# Altium PCB Power_Supply_HV.PcbDoc
Units mm, origin at the board's own origin, x right, y up, seen from the top; angles counter-clockwise.
Board outline 85.1 x 52.1 mm, 2 copper layers (Top Layer, Bottom Layer); 37 components, 19 nets, 76 pads, 120 vias.
Unrouted connection lines stored in the file: 14.
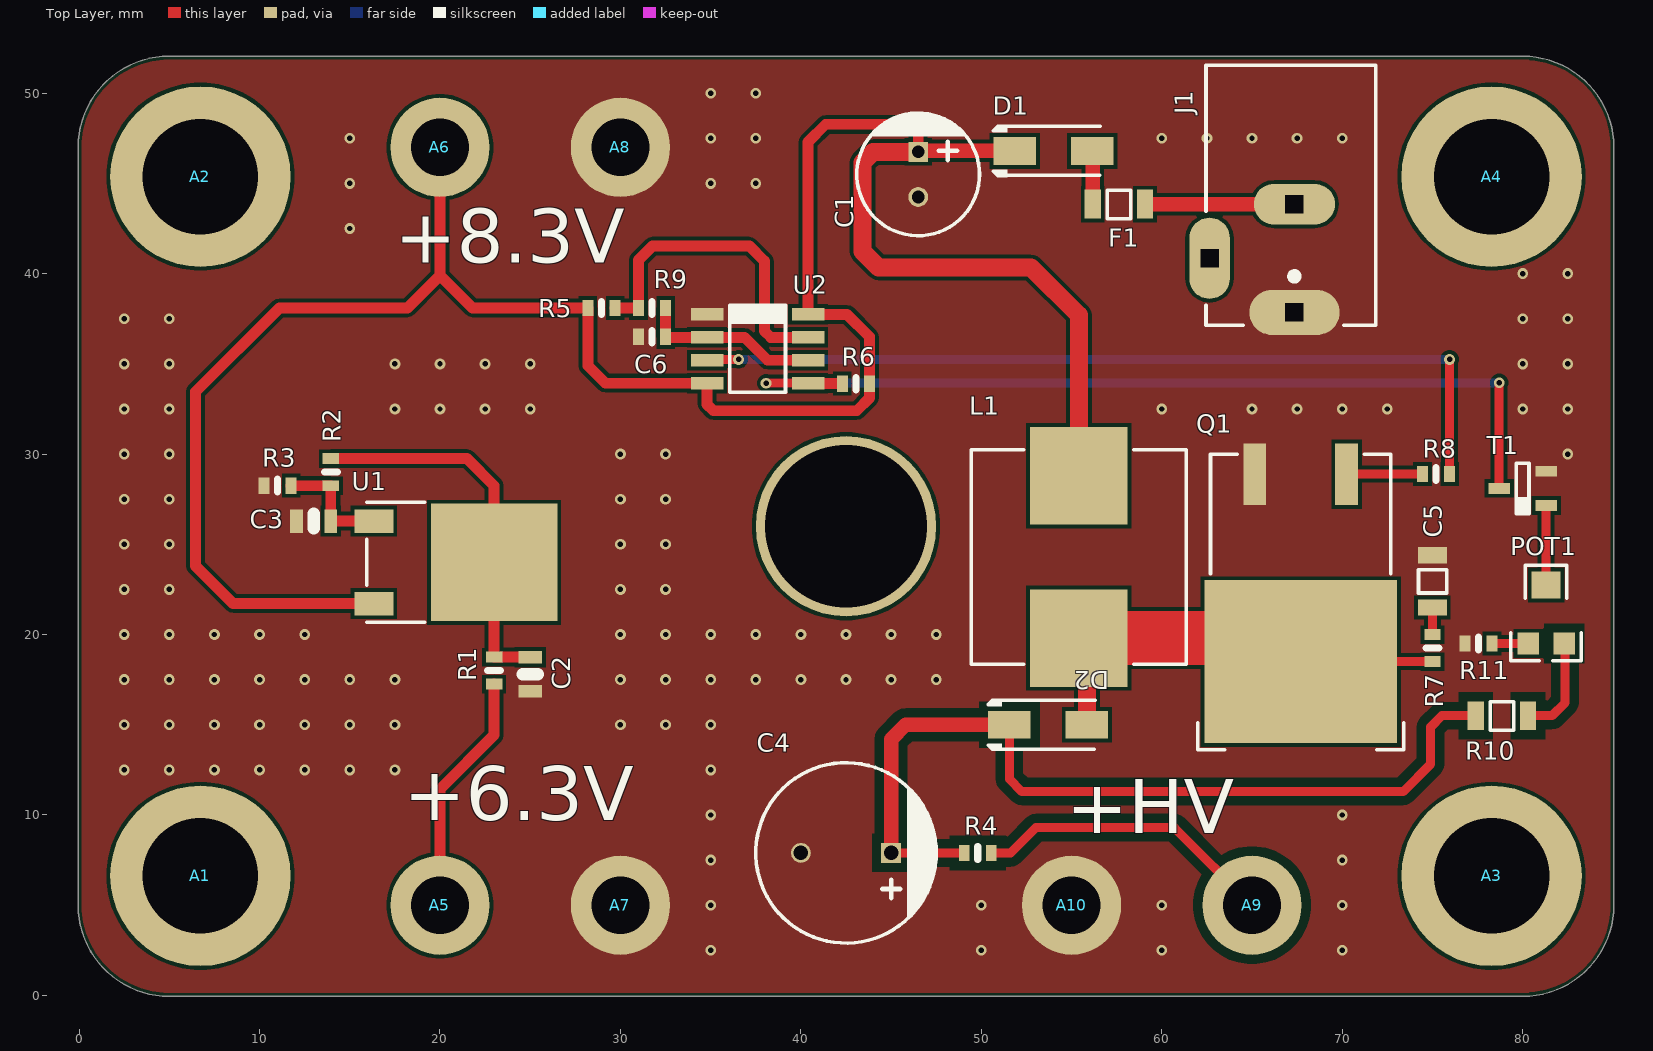
[diagram p0: Top Layer view]
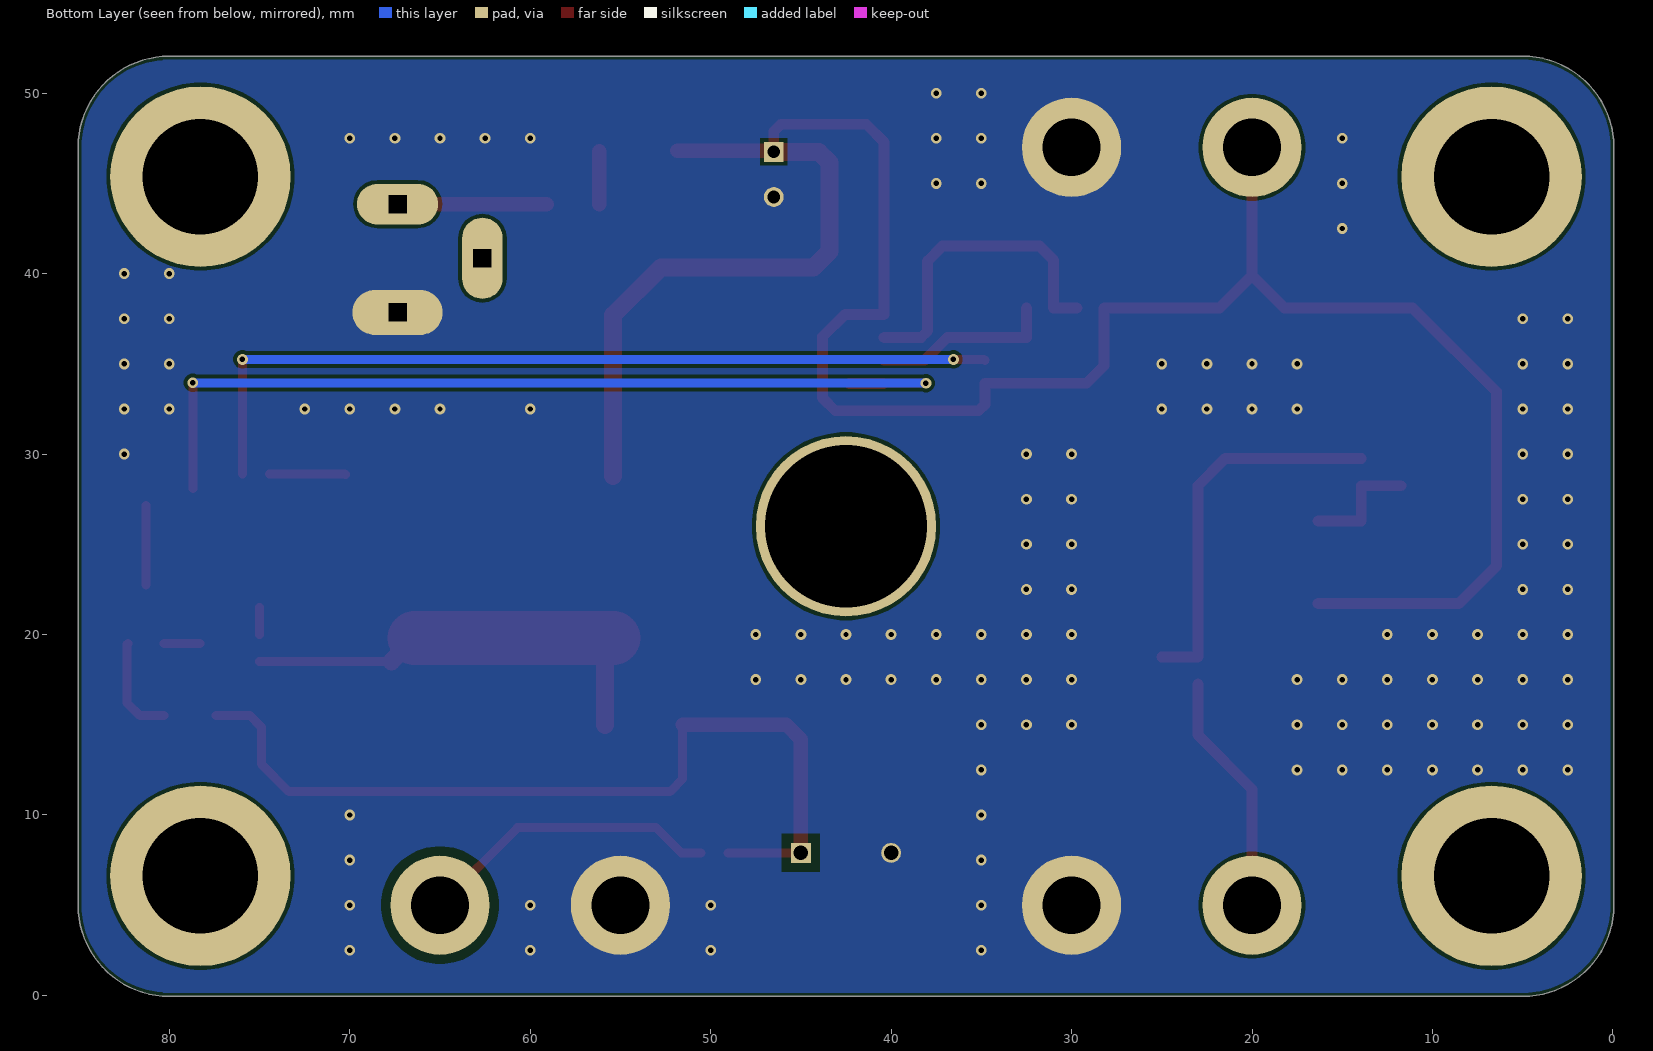
[diagram p1: Bottom Layer view, seen from below]
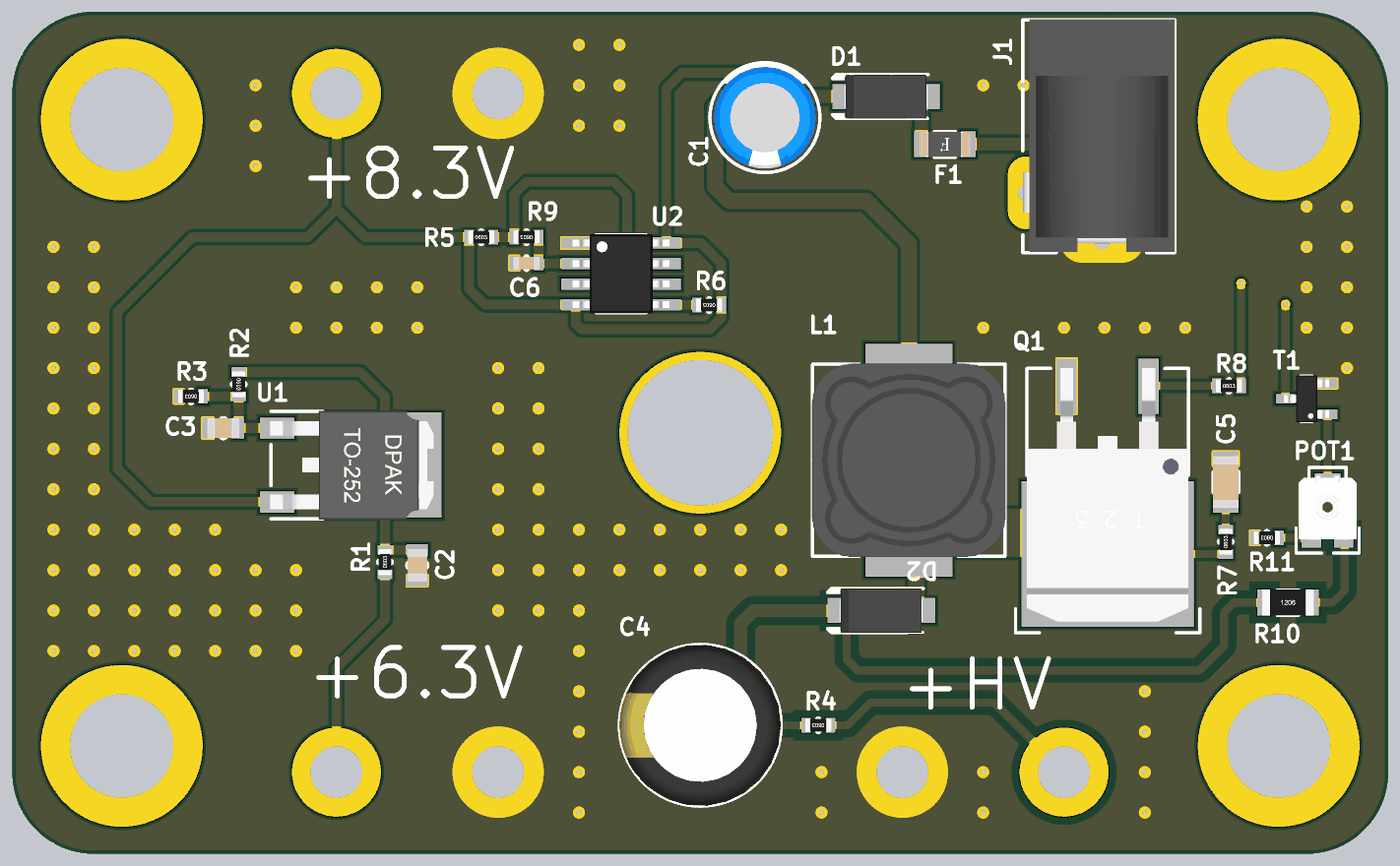
[diagram p2: 3D render of the assembled board from above, using the file's embedded part models]

## Layer stack, top to bottom
Top Solder: solder mask 0.0102, Solder Resist, Dk 3.5
Top Layer: signal copper 0.0356
Dielectric 1: dielectric 0.32, FR-4, Dk 4.8
Bottom Layer: signal copper 0.0356
Bottom Solder: solder mask 0.0102, Solder Resist, Dk 3.5

## Board outline
5,-0.05 cw(c5,5) -0.05,5 -0.05,5.001 -0.05,47 -0.05,47.001 cw(c5,47) 5,52.05 79.999,52.05 80.35,52.05 80.386,52.036 cw(c80,47) 85.05,47 85.05,46.999 85.05,5.001 85.05,5 cw(c80,5) 80.386,-0.036 80.35,-0.05 79.999,-0.05

## Design rules (kind name [scope] priority, off if disabled: settings)
BoardOutlineClearance [All] p1: gap=0.2 ignorepadtopadclearanceinfootprint=FALSE
Clearance Clearance_HV [InNet('+210V') or InNet('NetC4_1') or InNet('NetPOT1_3')] p1: gap=0.5 ignorepadtopadclearanceinfootprint=FALSE
Clearance [All] p2: gap=0.2 ignorepadtopadclearanceinfootprint=FALSE except(0.25: Arc-Hole Track-Hole SMDPad-Hole THPad-Hole Via-Hole Fill-Hole Poly-Hole Region-Hole Text-Hole)
ComponentClearance [All] p1: gap=0.127 collisioncheckmode=3 verticalgap=0.127 showdistances=TRUE
DiffPairsRouting [All] p1: maxlimit=0.254 minlimit=0.127 mostfreqgap=0.127 toplayer_minwidth=0.127 toplayer_maxwidth=25.4 toplayer_prefwidth=0.127 bottomlayer_minwidth=0.127 bottomlayer_maxwidth=25.4 bottomlayer_prefwidth=0.127 maxuncoupledlength=12.7
Height [All] p1: minheight=0 maxheight=1816.048 prefheight=12.7
HoleSize [All] p1: absolutevalues=TRUE maxlimit=6.3 minlimit=0.3 maxpercent=80.000 minpercent=20.000
HoleToHoleClearance [All] p1: gap=0.25 allowstackedmicrovias=FALSE
MinimumAnnularRing [All] p1: minimumring=0.076
MinimumSolderMaskSliver [All] p1: minsoldermaskwidth=0
PlaneClearance [All] p1: clearance=0.127
PlaneConnect PlaneConnectPowerPads [InPadClass('PowerPads')] p1: planeconnectstyle=Direct reliefexpansion=0.508 reliefentries=4 reliefconductorwidth=0.254 reliefairgap=0.254
PlaneConnect [All] p2: pad.planeconnectstyle=Relief pad.reliefexpansion=0.3 pad.reliefentries=4 pad.reliefconductorwidth=0.127 pad.reliefairgap=0.127 via.planeconnectstyle=Direct via.reliefexpansion=0.3 via.reliefentries=4 via.reliefconductorwidth=0.127 via.reliefairgap=0.127
PolygonConnect [All] p1: connectstyle=Direct reliefconductorwidth=0.127 reliefentries=4 polygonreliefangle="90 Angle" airgapwidth=0.127
PolygonConnect PolygonConnectPowerPads [All vs (InPadClass('PowerPads'))] p2: connectstyle=Direct reliefconductorwidth=0.254 reliefentries=4 polygonreliefangle="90 Angle" airgapwidth=0.254
RoutingVias [All] p1: holewidth=0.3 width=0.6 viastyle="Through Hole" minholewidth=0.3 minwidth=0.6 maxholewidth=0.6 maxwidth=6.6
SilkToSilkClearance [All] p1: silktosilkclearance=0
SilkToSolderMaskClearance [IsPad] p1: minsilkscreentomaskgap=0.127 clearancetoexposedcopper=TRUE
SolderMaskExpansion [All] p1: expansion=0.075 istentingtop=FALSE
Width Width_HV [InNetClass('HV')] p1: maxlimit=10 minlimit=0.2 preferedwidth=0.2 minimp=50.000000 maximp=50.000000 favimp=50.000000
Width Width_Supply [InNetClass('SUPPLY')] p2: maxlimit=0.5 minlimit=0.5 preferedwidth=0.5 minimp=50.000000 maximp=50.000000 favimp=50.000000
Width [All] p3: maxlimit=10 minlimit=0.127 preferedwidth=0.127
20 further rules are at their usual default settings.

## Components (designator, comment, footprint, x,y, rotation, side; value= is the part's Value field where it differs from the comment)
A1 "6mm" "HOLE M6" 6.725,6.625 r0 top
A2 "6mm" "HOLE M6" 6.725,45.375 r0 top
A3 "6mm" "HOLE M6" 78.275,6.625 r0 top
A4 "6mm" "HOLE M6" 78.275,45.375 r0 top
A5 "3mm" "HOLE M3" 20,5 r0 top
A6 "3mm" "HOLE M3" 20,47 r0 top
A7 "3mm" "HOLE M3" 30,5 r0 top
A8 "3mm" "HOLE M3" 30,47 r0 top
A9 "3mm" "HOLE M3" 65,5 r0 top
A10 "3mm" "HOLE M3" 55,5 r0 top
C1 "10u 50V" "CAPACITOR 6.3X11MM THT" 46.5,45.5 r270 top
C2 "4.7u 16V" "CAPACITOR 0805" 25,17.8 r90 top
C3 "4.7u 16V" "CAPACITOR 0805" 13,26.285 r0 top
C4 "10u 250V" "CAPACITOR 10X20MM THT" 42.5,7.9 r180 top
C5 "100p 200V" "CAPACITOR 1206" 75,22.95 r270 top
C6 "2.2n 50V" "CAPACITOR 0603" 31.75,36.5 r0 top
D1 "ES1D" "DIODE DO-214AC" 54,46.8 r180 top
D2 "ES1D" "DIODE DO-214AC" 53.7,15 r180 top
F1 "1A" "FUSE 1206" 57.625,43.85 r180 top
J1 "PJ-002A" "Mechanical CUI_PJ-002A" 65,40.85 r90 top
L1 "220u" "INDUCTOR CDRH127" 55.4,24.3 r270 top
POT1 "1k" "POTENTIOMETER TC33X" 81.3,21.3 r0 top
Q1 "IRF840STRLPBF" TO-263-3 67.7,22.5 r180 top
R1 "0R" "RESISTOR 0603" 23,18 r270 top
R2 "1.5k" "RESISTOR 0603" 13.95,29 r90 top
R3 "2.7k" "RESISTOR 0603" 11,28.25 r0 top
R4 "0R" "RESISTOR 0603" 49.8,7.9 r0 top
R5 "1k" "RESISTOR 0603" 28.95,38.1 r180 top
R6 "47k" "RESISTOR 0603" 43.05,33.9 r0 top
R7 "2.2k" "RESISTOR 0603" 75,19.25 r270 top
R8 "100R" "RESISTOR 0603" 75.2,28.9 r180 top
R9 "10k" "RESISTOR 0603" 31.75,38.1 r0 top
R10 "220K" "RESISTOR 1206" 78.85,15.5 r180 top
R11 "470R" "RESISTOR 0603" 77.55,19.5 r0 top
T1 "BC847BLT1G" SOT23-3 80,28.1 r90 top
U1 "LM1117" TO-252 23,24 r270 top
U2 "555" SOIC-8 37.6,35.835 r270 top

## Footprints (in the part's own frame and the unit in brackets; to place one, negate y for a bottom-side part, rotate by r counter-clockwise, add the part's x,y. Pads: shape width x height; smd on the part's side, far side on the other; paste and mask are expansions set on the pad)
"CAPACITOR 6.3X11MM THT" [mm]
  rect 1.1x1.1 / inner round 1.1 / far side rect 1.1x1.1 hole 0.7: 1(-1.25,0)
  round 1.1 hole 0.7: 2(1.25,0)
  silkscreen extent -3.4,-3.4 3.4,3.4, body extent -3.15,-3.15 3.15,3.15, height 11.5
"CAPACITOR 10X20MM THT" [mm]
  rect 1.1x1.1 / inner round 1.1 / far side rect 1.1x1.1 hole 0.8: 1(-2.5,0)
  round 1.1 hole 0.8: 2(2.5,0)
  silkscreen extent -5,-5 5,5, body extent -5,-4.99 5,4.99, height 20
"CAPACITOR 0603" [mm]
  rect 0.6x0.9 smd: 1(-0.75,0) 2(0.75,0)
  silkscreen extent 0,-0.35 0,0.35, body extent -0.8,-0.4 0.8,0.4, height 0.8
"CAPACITOR 0805" [mm]
  rect 0.7x1.3 smd: 1(-0.95,0) 2(0.95,0)
  silkscreen extent 0,-0.4 0,0.4, body extent -1,-0.63 1,0.63, height 0.6
"CAPACITOR 1206" [mm]
  rect 0.9x1.6 smd: 1(-1.45,0) 2(1.45,0)
  silkscreen extent -0.65,-0.77 0.65,0.8, body extent -1.6,-0.8 1.6,0.8, height 0.79
"DIODE DO-214AC" [mm]
  rect 2.35x1.55 smd: 1(-2.15,0) 2(2.15,0)
  silkscreen extent -2.6,-1.36 3.32,1.36, body extent -2.6,-1.36 2.6,1.36, height 2.5
"FUSE 1206" [mm]
  rect 0.9x1.6 smd: 1(-1.45,0) 2(1.45,0)
  silkscreen extent -0.65,-0.77 0.65,0.8, body extent -1.55,-0.77 1.55,0.78, height 0.61
"HOLE M3" [mm]
  round 5.5 hole 3.2: 1(0,0)
"HOLE M6" [mm]
  round 10 hole 6.4: 1(0,0)
"INDUCTOR CDRH127" [mm]
  rect 5.4x5.4 smd: 1(-4.5,0) 2(4.5,0)
  silkscreen extent -5.95,-5.95 5.95,5.95, body extent -6,-6 6,6, height 8
"Mechanical CUI_PJ-002A" [mm]
  oval 2.5x5 hole 1 square: 1(-3,-2.35)
  oval 2.25x4.5 hole 1 square: 2(3,-2.35)
  oval 4.5x2.25 hole 1 square: 3(0,2.35)
  silkscreen extent -3.7,-6.85 10.7,2.55, body extent -3.68,-6.85 10.72,2.55, height 11
"POTENTIOMETER TC33X" [mm]
  rect 1.2x1.2 smd: 1(-1,-1.8) 3(1,-1.8)
  rect 1.6x1.5 smd: 2(0,1.45)
  silkscreen extent -1.95,-2.75 1.95,2.55, body extent -1.8,-1.91 1.8,2.05, height 1.13
"RESISTOR 0603" [mm]
  rect 0.6x0.9 smd: 1(-0.75,0) 2(0.75,0)
  silkscreen extent 0,-0.35 0,0.35, body extent -0.8,-0.4 0.8,0.4, height 0.45
"RESISTOR 1206" [mm]
  rect 0.9x1.6 smd: 1(-1.45,0) 2(1.45,0)
  silkscreen extent -0.65,-0.77 0.65,0.8, body extent -1.6,-0.8 1.6,0.8, height 0.6
SOIC-8 [mm]
  rect 0.7x1.8 smd: 1(-1.905,-2.8) 2(-0.635,-2.8) 3(0.635,-2.8) 4(1.905,-2.8) 5(1.905,2.8) 6(0.635,2.8) 7(-0.635,2.8) 8(-1.905,2.8)
  silkscreen extent -2.4,-1.55 2.4,1.55, body extent -2.45,-3 2.45,3, height 1.75
SOT23-3 [mm]
  rect 0.6x1.2 smd: 1(-0.95,-1.3) 2(0.95,-1.3) 3(0,1.3)
  silkscreen extent -1.4,-0.35 1.4,0.35, body extent -1.45,-1.4 1.45,1.4, height 1.3
TO-252 [mm]
  rect 1.3x2.15 smd: 1(-2.285,-6.665) 3(2.285,-6.665)
  rect 6.5x7 smd: 2(0,0)
  silkscreen extent -3.32,-7.05 3.32,-3.85, body extent -3.37,-7.1 3.37,3, height 2.37
TO-263-3 [mil]
  rect 49.49x135 smd: 1(-100,-251.26) 3(100,-251.26)
  rect 420x355 smd: 2(0,157.48)
  silkscreen extent -224,-295 224,349, body extent -197,-295 197,322, height 188

## Part data
A1 A2 A3 A4: library part "Mechanical M6 Hole", "Mechanical M6 Hole", Manufacturer=-, ComponentLink1Description=Datasheet, ComponentLink1URL=-, Manufacturer Part Number=-, Price 10pcs [$]=-, Supplier=-
A5 A6 A7 A8 A9 A10: library part "Mechanical M3 Hole", "Mechanical M3 Hole", Manufacturer=-, ComponentLink1Description=Datasheet, ComponentLink1URL=-, Manufacturer Part Number=-, Price 10pcs [$]=-, Supplier=-
C1: library part "Capacitor 10u 50V 20% Aluminum 6.3x11mm THT", "Aluminum Electrolytic Capacitors - Radial Leaded WCAP-ATET 10uF 50V 20% Radial", Manufacturer="Wurth Elektronik", Manufacturer Part Number=860130673001, ComponentLink1Description=Datasheet, ComponentLink1URL=https://www.mouser.pl/datasheet/2/445/860130673001-3099956.pdf, Price 10pcs [$]=0.174, Supplier=Mouser
C2 C3: library part "Capacitor 4.7u 16V 10% X7R 0805", "Multilayer Ceramic Capacitors MLCC - SMD/SMT 0805 16VDC 4.7uF 10% X7R", Manufacturer="Taiyo Yuden", Manufacturer Part Number=EMK212B7475KG-T, ComponentLink1Description=Datasheet, ComponentLink1URL=https://www.mouser.pl/datasheet/2/396/mlcc02_e-1307760.pdf, Price 10pcs [$]=0.114, Supplier=Mouser
C4: library part "Capacitor 10u 250V 20% Aluminum 10x20mm THT", "Aluminum Electrolytic Capacitors - Radial Leaded 25V 100uF 105C 6.3x11mm", Manufacturer=Producent, Manufacturer Part Number=PJ2E100MNN1020, ComponentLink1Description=Datasheet, ComponentLink1URL=https://www.tme.eu/Document/f817dd3cf02528febed7ff40ffb84e0e/PART-NUMBER-SYSTEM.pdf, Price 10pcs [$]=0.215, Supplier=TME
C5: library part "Capacitor 100p 200V 10% X7R 1206", "Multilayer Ceramic Capacitors MLCC - SMD/SMT 200V 100pF X7R 1206 10% AEC-Q200", Manufacturer=KEMET, Manufacturer Part Number=C1206C101K2RACAUTO, ComponentLink1Description=Datasheet, ComponentLink1URL=https://www.mouser.pl/datasheet/2/212/KEM_C1023_X7R_AUTO_SMD-1093309.pdf, Price 10pcs [$]=0.338, Supplier=MOUSER
C6: library part "Capacitor 2.2n 50V 10% X7R 0603", "Multilayer Ceramic Capacitors MLCC - SMD/SMT 0603 50VDC 2200pF 10% X7R AEC-Q200", Manufacturer="Taiyo Yuden", Manufacturer Part Number=UMK107B7222KAHT, ComponentLink1Description=Datasheet, ComponentLink1URL=https://www.mouser.pl/datasheet/2/396/taiyo_yuden_12132018_mlcc11_hq_e-1510082.pdf, Price 10pcs [$]=0.09, Supplier=Mouser
D1 D2: library part "Diode 200V 1.5W 1A Rectifier Vf 920mV ES1D", "Rectifiers 1.0a Rectifier UF Recovery", Manufacturer="onsemi / Fairchild", ComponentLink1Description=Datasheet, ComponentLink1URL=https://www.mouser.pl/datasheet/2/308/ES1D_D-1805714.pdf, Manufacturer Part Number=ES1D, Price 10pcs [$]=0.383, Supplier=Mouser
F1: library part "Fuse 1A 1% 1/4W 1206", "Surface Mount Fuses 1A 63V TIME DELAY", Manufacturer=Bourns, Manufacturer Part Number=SF-1206HI100M-2, ComponentLink1Description=Datasheet, ComponentLink1URL=https://www.mouser.pl/datasheet/2/54/sf_1206hi_m-1366413.pdf, Price 10pcs [$]=0.681, Supplier=Mouser
J1: library part "Mechanical DC Power Connectors Power Jacks", "DC Power Connectors Power Jacks", Datasheet=https://pl.mouser.com/datasheet/2/670/pj_002a-1778764.pdf, Manufacturer=https://pl.mouser.com/datasheet/2/670/pj_002a-1778764.pdf, Manufacturer Part Number=PJ-002A, Type=THT
L1: library part "Inductor 220uH 0.95A Shielded 49221C", "Power Inductors - SMD 220uH 0.95A Dual wind inductor", Manufacturer="Murata Power Solutions", Manufacturer Part Number=49221C, ComponentLink1Description=Datasheet, ComponentLink1URL=https://www.mouser.pl/datasheet/2/281/1/kmp_4800-2936266.pdf, Price 10pcs [$]=1.36, Supplier=Mouser
POT1: library part "Potentiometer PCB 1k SMD TC33X-1-102E", "Trimmer Resistors - SMD TRIMMER-3MM OPEN FRAME", Manufacturer=Bourns, Manufacturer Part Number=TC33X-1-102E, ComponentLink1Description=Datasheet, ComponentLink1URL=https://www.mouser.pl/datasheet/2/54/tc33-778219.pdf, Price 10pcs [$]=0.275, Supplier=Mouser
Q1: library part "Transistor N-MOSFET 500V 8A TO-263-3 IRF840STRLPBF", "MOSFET 500V N-CH HEXFET D2-PA", Manufacturer="Vishay Semiconductors", ComponentLink1Description=Datasheet, ComponentLink1URL=https://www.mouser.pl/datasheet/2/427/sihf840s-1768741.pdf, Manufacturer Part Number=IRF840STRLPBF, Price 10pcs [$]=2.57, Supplier=Mouser
R1 R4: library part "Resistor 0R 1% 1/10W 0603", "Thick Film Resistors - SMD 0 Ohms 100 mW 0603 5%", Manufacturer=Yageo, Manufacturer Part Number=RC0603JR-070RL, ComponentLink1Description=Datasheet, ComponentLink1URL=https://www.mouser.pl/datasheet/2/447/PYu_RC_Group_51_RoHS_L_11-1984063.pdf, Price 10pcs [$]=0.02, Supplier=Mouser
R2: library part "Resistor 1.5k 1% 1/10W 0603", "Thin Film Resistors - SMD 1/10W 1.5K ohm 1% 50ppm", Manufacturer=Yageo, Manufacturer Part Number=RT0603FRE071K5L, ComponentLink1Description=Datasheet, ComponentLink1URL=https://www.mouser.pl/datasheet/2/447/PYu_RT_1_to_0_01_RoHS_L_12-3003070.pdf, Price 10pcs [$]=0.057, Supplier=Mouser
R3: library part "Resistor 2.7k 1% 1/10W 0603", "Thin Film Resistors - SMD 1/10W 2.7K ohm 1% 50ppm", Manufacturer=Yageo, Manufacturer Part Number=RT0603FRE072K7L, ComponentLink1Description=Datasheet, ComponentLink1URL=https://www.mouser.pl/datasheet/2/447/PYu_RT_1_to_0_01_RoHS_L_12-3003070.pdf, Price 10pcs [$]=0.057, Supplier=Mouser
R5: library part "Resistor 1k 1% 1/10W 0603", "Thin Film Resistors - SMD 1/10W 1K ohm 1% 50ppm", Manufacturer=Yageo, Manufacturer Part Number=RT0603FRE071KL, ComponentLink1Description=Datasheet, ComponentLink1URL=https://www.mouser.pl/datasheet/2/447/PYu_RT_1_to_0_01_RoHS_L_12-3003070.pdf, Price 10pcs [$]=0.057, Supplier=Mouser
R6: library part "Resistor 47k 1% 1/10W 0603", "Thin Film Resistors - SMD 1/10W 47K ohm 1% 50ppm", Manufacturer=Yageo, Manufacturer Part Number=RT0603FRE1347KL, ComponentLink1Description=Datasheet, ComponentLink1URL=https://www.mouser.pl/datasheet/2/447/PYu_RT_1_to_0_01_RoHS_L_12-3003070.pdf, Price 10pcs [$]=0.057, Supplier=Mouser
R7: library part "Resistor 2.2k 1% 1/10W 0603", "Thin Film Resistors - SMD 1/10W 2.2K ohm 1% 50ppm", Manufacturer=Yageo, Manufacturer Part Number=RT0603FRE072K2L, ComponentLink1Description=Datasheet, ComponentLink1URL=https://www.mouser.pl/datasheet/2/447/PYu_RT_1_to_0_01_RoHS_L_12-3003070.pdf, Price 10pcs [$]=0.057, Supplier=Mouser
R8: library part "Resistor 100R 1% 1/10W 0603", "Thin Film Resistors - SMD 1/10W 100R ohm 1% 50ppm", Manufacturer=Yageo, Manufacturer Part Number=RT0603FRE07100RL, ComponentLink1Description=Datasheet, ComponentLink1URL=https://www.mouser.pl/datasheet/2/447/PYu_RT_1_to_0_01_RoHS_L_12-3003070.pdf, Price 10pcs [$]=0.057, Supplier=Mouser
R9: library part "Resistor 10k 1% 1/10W 0603", "Thin Film Resistors - SMD 1/10W 10K ohm 1% 50ppm", Manufacturer=Yageo, Manufacturer Part Number=RT0603FRE1310KL, ComponentLink1Description=Datasheet, ComponentLink1URL=https://www.mouser.pl/datasheet/2/447/PYu_RT_1_to_0_01_RoHS_L_12-3003070.pdf, Price 10pcs [$]=0.057, Supplier=Mouser
R10: library part "Resistor 220k 1% 1/4W 1206", "Thin Film Resistors - SMD 1/4W 220 kohm 1% 50ppm", Manufacturer=Yageo, Manufacturer Part Number=RT1206FRE07220KL, ComponentLink1Description=Datasheet, ComponentLink1URL=https://www.mouser.pl/datasheet/2/447/PYu_RT_1_to_0_01_RoHS_L_12-3003070.pdf, Price 10pcs [$]=0.125, Supplier=Mouser
R11: library part "Resistor 470R 1% 1/10W 0603", "Thin Film Resistors - SMD 1/10W 470R ohm 1% 50ppm", Manufacturer=Yageo, Manufacturer Part Number=RT0603FRE07470RL, ComponentLink1Description=Datasheet, ComponentLink1URL=https://www.mouser.pl/datasheet/2/447/PYu_RT_1_to_0_01_RoHS_L_12-3003070.pdf, Price 10pcs [$]=0.057, Supplier=Mouser
T1: library part "Transistor NPN 100mA 50V BC847BLT1G", "Bipolar Transistors - BJT 100mA 50V NPN", Manufacturer=onsemi, ComponentLink1Description=Datasheet, ComponentLink1URL=https://www.mouser.pl/datasheet/2/308/BC846ALT1_D-1387679.pdf, Manufacturer Part Number=BC847BLT1G, Price 10pcs [$]=0.094, Supplier=Mouser
U1: library part "IC LDO ADJ 800mA TO-252 LM1117DT-ADJ", "LDO Voltage Regulators 800MA LDO LINEAR REG", Manufacturer="Texas Instruments", Manufacturer Part Number=LM1117DT-ADJ, ComponentLink1Description=Datasheet, ComponentLink1URL=https://www.ti.com/general/docs/suppproductinfo.tsp?distId=26&gotoUrl=https://www.ti.com/lit/gpn/lm1117, Price 10pcs [$]=1.72, Supplier=Mouser
U2: library part "IC Timer Module 555 SO-8", "Timers & Support Products Precision", Manufacturer="Texas Instruments", Manufacturer Part Number=NE555DR, ComponentLink1Description=Datasheet, ComponentLink1URL=https://www.ti.com/general/docs/suppproductinfo.tsp?distId=26&gotoUrl=https://www.ti.com/lit/gpn/se555m, Price 10pcs [$]=0.196, Supplier=TME

## Free pads (board coordinates)
  round 10 hole 9: 3(42.5,26)

## Via types
v1: diameter 0.6, hole 0.3, Top Layer to Bottom Layer, 120 vias

## Nets (pads, with @x,y where several pads share a name; then routed paths per layer and width w, separated by ;. In a path a pad name is that pad's centre, name@x,y a point inside that pad or via, vN(x,y) a via of type N, cw(c..) or ccw(c..) an arc to the next point about the centre after c; other vN are vias at no path point)
+6.3V: A5.1 R1.2 | length 13.5
  Top Layer w0.6: A5.1 20,11.425 23,14.425 R1.2
+8.3V: A6.1 C1.1 D1.2 L1.1 R5.2 R6.2 U1.3 U2.4 U2.8 | length 134.1
  Top Layer w0.2: C1.1 C1.1@46.55,46.8
  Top Layer w0.6: U1.3 8.535,21.715 6.45,23.8 6.45,33.45 11.1,38.1 18.2,38.1 20,39.9 ; A6.1 20,39.9 ; C1.1 46.5,47.875 46.1,48.275 41.375,48.275 40.4,47.3 U2.8 42.56,37.74 43.8,36.5 R6.2 43.8,33.1 43.1,32.4 35.151,32.4 34.8,32.751 U2.4 29.17,33.93 28.2,34.9 R5.2 21.8,38.1 20,39.9
  Top Layer w0.8: C1.1@46.55,46.8 D1.2
  Top Layer w1: C1.1 44.011,46.75 43.425,46.164 43.425,41.225 44.3,40.35 52.75,40.35 55.4,37.7 L1.1
+210V: A9.1 R4.2 | length 16.8
  Top Layer w0.5: R4.2 51.625,7.9 53.025,9.3 60.7,9.3 A9.1
GND: A7.1 A8.1 A10.1 C1.2 C2.1 C3.1 C4.2 C5.1 C6.1 J1.1 Q1.3 R3.1 R11.1 T1.2 U2.1
  other v1: 35,2.5 50,2.5 60,2.5 70,2.5 35,5 50,5 60,5 70,5 35,7.5 70,7.5 35,10 70,10 2.5,12.5 5,12.5 7.5,12.5 10,12.5 12.5,12.5 15,12.5 17.5,12.5 35,12.5 2.5,15 5,15 7.5,15 10,15 12.5,15 15,15 17.5,15 30,15 32.5,15 35,15 2.5,17.5 5,17.5 7.5,17.5 10,17.5 12.5,17.5 15,17.5 17.5,17.5 30,17.5 32.5,17.5 35,17.5 37.5,17.5 40,17.5 42.5,17.5 45,17.5 47.5,17.5 2.5,20 5,20 7.5,20 10,20 12.5,20 30,20 32.5,20 35,20 37.5,20 40,20 42.5,20 45,20 47.5,20 2.5,22.5 5,22.5 30,22.5 32.5,22.5 2.5,25 5,25 30,25 32.5,25 2.5,27.5 5,27.5 30,27.5 32.5,27.5 2.5,30 5,30 30,30 32.5,30 82.5,30 2.5,32.5 5,32.5 17.5,32.5 20,32.5 22.5,32.5 25,32.5 60,32.5 65,32.5 67.5,32.5 70,32.5 72.5,32.5 80,32.5 82.5,32.5 2.5,35 5,35 17.5,35 20,35 22.5,35 25,35 80,35 82.5,35 2.5,37.5 5,37.5 80,37.5 82.5,37.5 80,40 82.5,40 15,42.5 15,45 35,45 37.5,45 15,47.5 35,47.5 37.5,47.5 60,47.5 62.5,47.5 65,47.5 67.5,47.5 70,47.5 35,50 37.5,50
NetC2_2: C2.2 R1.1 R2.2 U1.2 | length 21.2
  Top Layer w0.6: R2.2 21.5,29.75 23,28.25 U1.2 R1.1 C2.2
NetC3_2: C3.2 R2.1 R3.2 U1.1 | length 6.5
  Top Layer w0.6: R3.2 R2.1 C3.2 U1.1
NetC4_1: C4.1 D2.2 R4.1 R10.2 | length 49.3
  Top Layer w0.5: C4.1 R4.1 ; D2.2 51.55,12 52.25,11.3 73.375,11.3 74.9,12.825 74.9,14.875 75.525,15.5 R10.2
  Top Layer w0.8: C4.1 45,14.2 45.8,15 D2.2
NetC5_2: C5.2 R7.1 | length 1.5
  Top Layer w0.5: R7.1 C5.2
NetC6_2: C6.2 R9.2 U2.2 U2.6 | length 10.1
  Top Layer w0.6: R9.2 C6.2 32.5,36.47 U2.2 36.88,36.47 38.15,35.2 U2.6
NetD1_1: D1.1 F1.2 | length 3
  Top Layer w0.2: D1.1 D1.1@56.175,46.775
  Top Layer w0.8: F1.2 D1.1@56.175,46.775
NetD2_1: D2.1 L1.2 Q1.2 R7.2 | length 25.1
  Top Layer w0.5: Q1.2 R7.2
  Top Layer w1: L1.2 55.85,19.35 D2.1 ; Q1.2@66.4,19.8 Q1.2
  Top Layer w3: L1.2 Q1.2@66.4,19.8
NetF1_1: F1.1 J1.2 | length 8.3
  Top Layer w0.8: F1.1 J1.2
NetPOT1_1: POT1.1 R11.2 | length 2
  Top Layer w0.5: R11.2 POT1.1
NetPOT1_2: POT1.2 T1.1 | length 4.4
  Top Layer w0.5: POT1.2 T1.1
NetPOT1_3: POT1.3 R10.1 | length 5.6
  Top Layer w0.5: R10.1 81.625,15.5 82.35,16.225 82.35,19.45 POT1.3
NetQ1_1: Q1.1 R8.2 | length 4.2
  Top Layer w0.5: Q1.1 70.258,28.9 R8.2
NetR5_1: R5.1 R9.1 U2.7 | length 18
  Top Layer w0.6: R5.1 R9.1 31,40.75 31.775,41.525 37.15,41.525 37.975,40.7 37.975,36.821 38.326,36.47 U2.7
NetR6_1: R6.1 T1.3 U2.5 | length 50.7
  Top Layer w0.5: v1(38.075,33.925) 38.077,33.927 40.397,33.927 U2.5 ; T1.3 v1(78.7,33.95)
  Top Layer w0.6: U2.5 40.415,33.915 42.3,33.915 R6.1
  Bottom Layer w0.5: v1(38.075,33.925) 38.087,33.937 78.687,33.937 v1(78.7,33.95)
NetR8_1: R8.1 U2.3 | length 47.5
  Top Layer w0.5: U2.3 34.85,35.25 v1(36.55,35.25) ; R8.1 v1(75.95,35.25)
  Bottom Layer w0.5: v1(36.55,35.25) v1(75.95,35.25)
pads on no net: A1.1 A2.1 A3.1 A4.1 J1.3

## Polygon pours and split planes (outlines as drawn)
GND on Bottom Layer "GND_L02_P001" (solid, pour order 1): 0,0 0,52 85,52 85,0
GND on Top Layer "GND_L01_P000" (solid, pour order 0): 0,0 0,52 85,52 85,0

## Silkscreen, mask and mechanical layers (free items; w line width, h text height)
Top Overlay:
  text "+8.3V" at 17.5,40.6 h3
  text "+6.3V" at 18,9.7 h3
  text "+HV" at 54.7,9 h3
Bottom Solder:
  text "Designer: Mateusz Kowalczyk / Project: 555 HV Supply / Version: 1 / Date: 19.09.2021" at 52.5,25 h1 r180
PCB Outline:
  lines w0.1: 80,0 ccw(c80,5) 85,5 85,47 ccw(c80,47) 80,52 ; 80.35,0 5,0 cw(c5,5) 0,5 0,47 cw(c5,47) 5,52 80.35,52

## Dimensions
5,52 to 0.5,0 on Dimensions
0,0 to 85,5 on Dimensions